# Altium PCB Sheet2.PcbDoc
Units mil, origin at the board's own origin, x right, y up, seen from the top; angles counter-clockwise.
Board outline 6000 x 4000 mil, 2 copper layers (Top Layer, Bottom Layer); 46 components, 38 nets, 171 pads, 0 vias.
Unrouted connection lines stored in the file: 97.
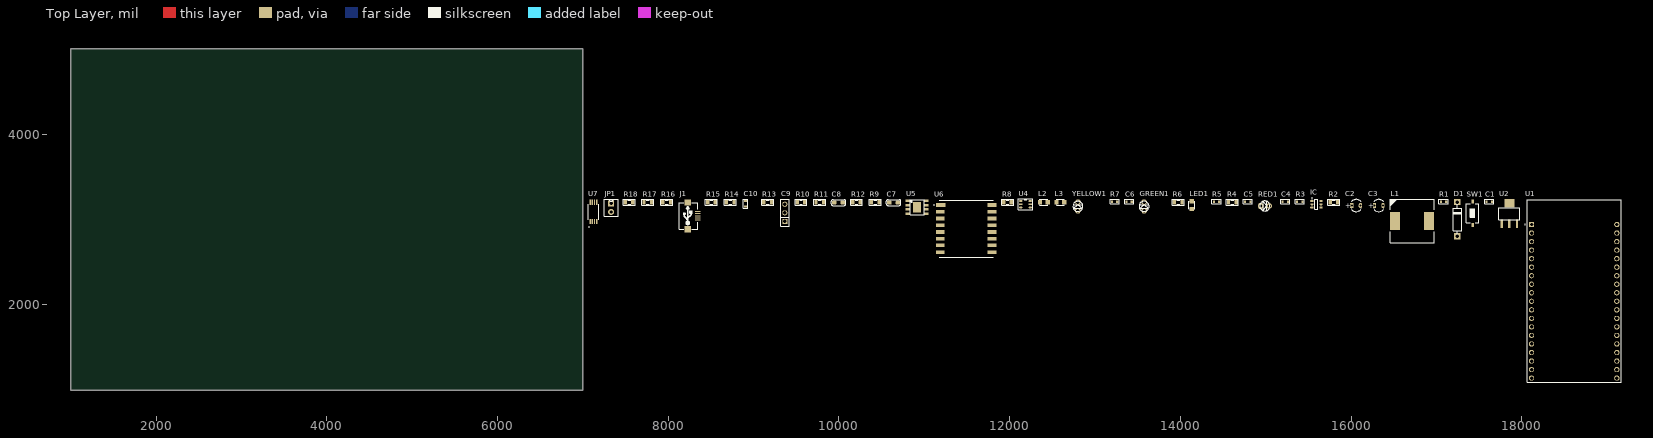
[diagram p0: Top Layer view]
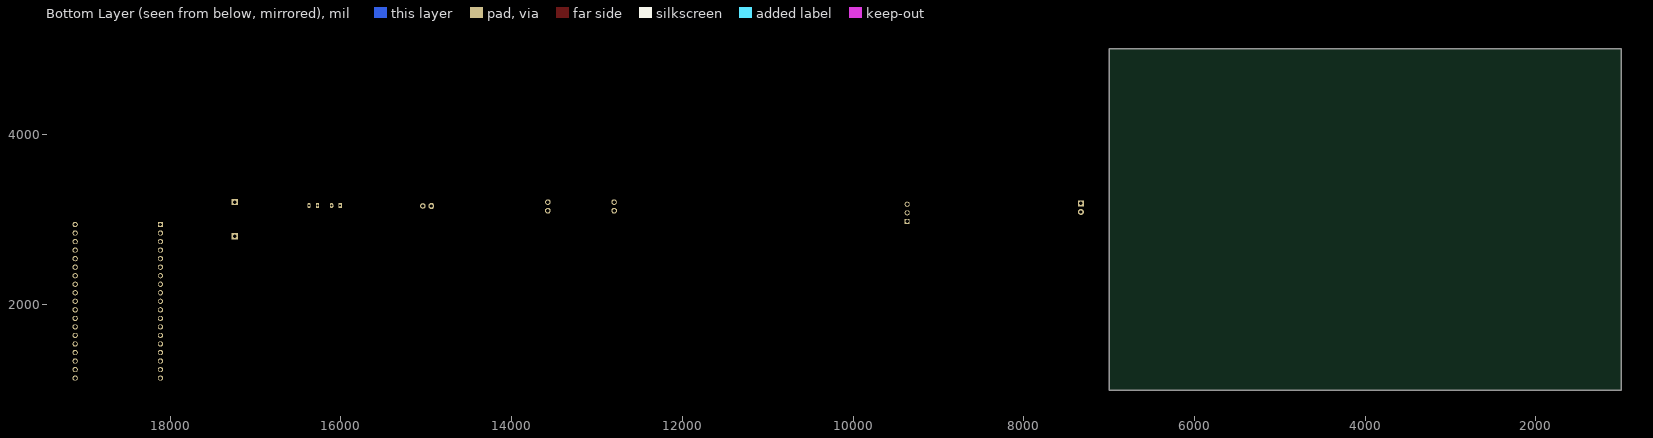
[diagram p1: Bottom Layer view, seen from below]

## Layer stack, top to bottom
Top Solder: solder mask 0.4, Solder Resist, Dk 3.5
Top Layer: signal copper 1.4
Dielectric 1: dielectric 12.6, FR-4, Dk 4.8
Bottom Layer: signal copper 1.4
Bottom Solder: solder mask 0.4, Solder Resist, Dk 3.5

## Board outline
1000,1000 7000,1000 7000,5000 1000,5000

## Design rules (kind name [scope] priority, off if disabled: settings)
Clearance [All] p1: gap=10 ignorepadtopadclearanceinfootprint=FALSE except(0: Arc-Hole Track-Hole SMDPad-Hole THPad-Hole Via-Hole Fill-Hole Poly-Hole Region-Hole Text-Hole)
PolygonConnect [All] p1: connectstyle=Relief reliefconductorwidth=10 reliefentries=4 polygonreliefangle="90 Angle" airgapwidth=10
RoutingVias [All] p1: holewidth=28 width=50 viastyle="Through Hole" minholewidth=28 minwidth=50 maxholewidth=28 maxwidth=50
SolderMaskExpansion [All] p1: expansion=4 istentingtop=FALSE
Width [All] p1: maxlimit=10 minlimit=10 preferedwidth=10
30 further rules are at their usual default settings.

## Components (designator, comment, footprint, x,y, rotation, side; value= is the part's Value field where it differs from the comment)
C1 "104" CAP0603 17620,3210 r0 top
C2 "10 uF" C3MM 16060,3165 r0 top
C3 "10 uF" C3MM 16325,3165 r0 top
C4 "22uF" CAP0603 15230,3210 r0 top
C5 "22uF" CAP0603 14790,3210 r0 top
C6 "104" CAP0603 13400,3210 r0 top
C7 "10uF" CAP_0805 10640,3200 r0 top value=33p
C8 "0.1 uF" CAP_0805 9995,3200 r0 top value=33p
C9 "JP3" JP3-C1T 9365,2980 r90 top
C10 "104" CAP0603 8905,3185 r90 top
D1 "SS54" DIODE/POW/1A 17245,2805 r90 top
GREEN1 "LED" LED-3MM-GREEN 13575,3105 r90 top value="LED 3 ly Single Colour"
IC "MT3608" "TSOP 2" 15595,3180 r0 top
J1 "USB-5" USB-M1 8345,3045 r90 top
JP1 "JP2" CON2 7330,3190 r0 top value="Connector 2"
L1 "22uH" IND_400_500_212x114_SMD 16715,2985 r0 top
L2 "LED 0805" LED-0805-Green 12355,3205 r0 top
L3 "LED 0805" LED-0805-Red 12550,3205 r0 top
LED1 "LED" LED-0805-Red 14135,3125 r90 top value="LED 3 ly Single Colour"
R1 "1.1K" RES0603 17085,3210 r0 top value=1K
R2 "110K" RES-SMD-0805 15800,3205 r0 top
R3 "1.1K" RES0603 15400,3210 r0 top value=1K
R4 "15k" RES-SMD-0805 14610,3205 r0 top
R5 "1.1K" RES0603 14425,3210 r0 top value=1K
R6 "330" RES-SMD-0805 13975,3205 r0 top
R7 "1.1K" RES0603 13230,3210 r0 top value=1K
R8 "1K" RES-SMD-0805 11975,3205 r0 top
R9 "100" RES-SMD-0805 10425,3205 r0 top
R10 "1k" RES-SMD-0805 9555,3205 r0 top
R11 "1k" RES-SMD-0805 9775,3205 r0 top
R12 "1K" RES-SMD-0805 10205,3205 r0 top
R13 "1k" RES-SMD-0805 9165,3205 r0 top
R14 "1K" RES-SMD-0805 8725,3205 r0 top
R15 "1.2k" RES-SMD-0805 8505,3205 r0 top
R16 "1K" RES-SMD-0805 7980,3205 r0 top
R17 "1K" RES-SMD-0805 7760,3205 r0 top
R18 "1K" RES-SMD-0805 7540,3205 r0 top
RED1 "LED" LED-3MM-RED 14940,3160 r0 top value="LED 3 ly Single Colour"
SW1 "SW" SW1-SMD 17425,3075 r90 top value="SW chip 2 pin"
U1 "ESP32-DEVKITC-32D" MODULE_ESP32-DEVKITC-32D 18615,2165 r0 top
U2 "LM1117-3V3" LM1117-SOP 17855,3000 r0 top
U4 "DW01A" SOT23-6 12190,3185 r0 top
U5 "TP4056" TP4056 10915,3145 r0 top
U6 "RA-01_LORA" MODULE_RA-02_LORA 11490,2895 r0 top
U7 "FS8205A" FS8205A 7125,3090 r90 top
YELLOW1 "LED" LED-3MM-YELLOW 12800,3105 r90 top value="LED 3 ly Single Colour"

## Footprints (in the part's own frame and the unit in brackets; to place one, negate y for a bottom-side part, rotate by r counter-clockwise, add the part's x,y. Pads: shape width x height; smd on the part's side, far side on the other; paste and mask are expansions set on the pad)
C3MM [mm]
  rect 1x1.5 hole 0.6: 1(-1.27,0)
  oval 1x1.5 hole 0.6: 2(1.27,0)
  silkscreen extent -1.5,-1.81 1.5,1.8, body extent -2,-2.03 1.99,1.97, height 7.01
CAP0603 [mm]
  rect 0.65x0.85 smd: 1(-0.8,0) 2(0.8,0)
  silkscreen extent -1.38,-0.67 1.38,0.67, body extent -0.8,-0.4 0.8,0.4, height 0.79
CAP_0805 [mil]
  rrect50% 50x50 smd: 1(-50,0) 2(50,0)
  silkscreen extent -85,-35 85,35, body extent -40,-25 40,25, height 24
CON2 [mil]
  rect 70x70 hole 39.37 unplated: 1(0,0)
  round 70 hole 39.37 unplated: 2(0,-100)
  silkscreen extent -82,-150 82,50
DIODE/POW/1A [mm]
  rect 1.8x1.8 hole 1: 1(0,0) 2(10.16,0)
  silkscreen extent 0.64,-1.27 9.53,1.14, body extent -0.38,-1.28 10.54,1.28, height 2.55
FS8205A [mm]
  rrect25% 1.56x0.4 smd: 1(-2.88,1.031) 2(-2.88,0.381) 3(-2.88,-0.269) 4(-2.88,-0.919) 5(2.88,-0.919) 6(2.88,-0.269) 7(2.88,0.381) 8(2.88,1.031)
  silkscreen extent -4.54,-1.46 2.25,1.57, body extent -3.2,-1.4 3.2,1.53, height 1.2
IND_400_500_212x114_SMD [mm] "wurth inductor"
  rect 2.9x5.4 smd: 1(-5.08,0) 2(5.08,0)
  silkscreen extent -6.48,-6.48 6.6,6.48, body extent -6.12,-6.02 6.13,6.03, height 8.1
JP3-C1T [mm] "3 row, straight, gold plating"
  rect 1.52x1.52 hole 1.02: 1(0,0)
  round 1.52 hole 1.02: 2(2.54,0) 3(5.08,0)
  silkscreen extent -1.52,-1.27 6.6,1.27, body extent -1.52,-1.25 6.6,1.25, height 8.51
LED-3MM-GREEN [mil]
  oct 65x65 hole 40: 1(0,0)
  round 65 hole 40: 2(100,0)
  silkscreen extent -9,-59 109,59, body extent -15,-70 112,60, height 182
LED-3MM-RED [mil]
  oct 65x65 hole 40: 1(0,0)
  round 65 hole 40: 2(100,0)
  silkscreen extent -9,-59 109,59, body extent -27,-77 117,80, height 181
LED-3MM-YELLOW [mil]
  oct 65x65 hole 40: 1(0,0)
  round 65 hole 40: 2(100,0)
  silkscreen extent -9,-59 109,59, body extent -27,-77 117,80, height 181
LED-0805-Green [mil]
  rect 50x55 smd: 1(0,0) 2(90,0)
  silkscreen extent 0,-35 90,35, body extent 5,-25 85,25, height 43
LED-0805-Red [mil]
  rect 50x55 smd: 1(0,0) 2(90,0)
  silkscreen extent 0,-35 90,35, body extent 5,-25 85,25, height 43
LM1117-SOP [mm]
  rect 0.7x2.54 smd: 1(-2.3,-1.27) 2(0,-1.27) 3(2.3,-1.27)
  rect 3x2.54 smd: 2(0,4.826)
  silkscreen extent -3.17,0 3.17,3.56, body extent -3.25,-1.78 3.25,5.18, height 1.68
MODULE_ESP32-DEVKITC-32D [mm]
  rect 1.56x1.56 / inner round 1.56 / far side rect 1.56x1.56 hole 1.04: J2-1(-12.7,19.76)
  round 1.56 hole 1.04: J2-2(-12.7,17.22) J2-3(-12.7,14.68) J2-4(-12.7,12.14) J2-5(-12.7,9.6) J2-6(-12.7,7.06) J2-7(-12.7,4.52) J2-8(-12.7,1.98) J2-9(-12.7,-0.56) J2-10(-12.7,-3.1) J2-11(-12.7,-5.64) J2-12(-12.7,-8.18) J2-13(-12.7,-10.72) J2-14(-12.7,-13.26) J2-15(-12.7,-15.8) J2-16(-12.7,-18.34) J2-17(-12.7,-20.88) J2-18(-12.7,-23.42) J2-19(-12.7,-25.96) J3-1(12.7,19.76) J3-2(12.7,17.22) J3-3(12.7,14.68) J3-4(12.7,12.14) J3-5(12.7,9.6) J3-6(12.7,7.06) J3-7(12.7,4.52) J3-8(12.7,1.98) J3-9(12.7,-0.56) J3-10(12.7,-3.1) J3-11(12.7,-5.64) J3-12(12.7,-8.18) J3-13(12.7,-10.72) J3-14(12.7,-13.26) J3-15(12.7,-15.8) J3-16(12.7,-18.34) J3-17(12.7,-20.88) J3-18(12.7,-23.42) J3-19(12.7,-25.96)
  silkscreen extent -14.7,-27.25 13.95,27.15, body extent -13.97,-27.9 13.97,27.2, height 6.69
MODULE_RA-02_LORA [mm]
  rect 2.8x1.1 smd: 1(-7.6,7)
  rect 2.6x1.1 smd: 2(-7.7,5) 3(-7.7,3) 4(-7.7,1) 5(-7.7,-1) 6(-7.7,-3) 7(-7.7,-5) 8(-7.7,-7) 9(7.7,-7) 10(7.7,-5) 11(7.7,-3) 12(7.7,-1) 13(7.7,1) 14(7.7,3) 15(7.7,5) 16(7.7,7)
  silkscreen extent -9.68,-8.5 8,8.5
RES0603 [mm]
  rect 0.65x0.85 smd: 1(-0.8,0) 2(0.8,0)
  silkscreen extent -1.38,-0.67 1.38,0.67, body extent -0.78,-0.42 0.77,0.43, height 0.45
RES-SMD-0805 [mil]
  rect 39.37x55 smd: 1(-45,0) 2(45,0)
  silkscreen extent -70,-34 70,33, body extent -39,-25 39,25, height 31
SOT23-6 [mil]
  oct 40x20 smd: 1(-59.41,32.4)
  oval 40x20 smd: 2(-59.41,-4.6) 3(-59.41,-42.6) 4(50.59,-42.6) 5(50,-5) 6(50.59,32.4)
  silkscreen extent -89,-68 81,57, body extent -64,-64 54,54, height 51
SW1-SMD [mm]
  rect 1.2x0.8 smd: 1(-3.5,0) 2(3.5,0)
  silkscreen extent -2.82,-1.85 2.82,1.85, body extent -3.05,-1.85 3.05,1.85, height 2.5
TP4056 [mm]
  rect 1.3x0.7 smd: 1(-2.75,1.905) 2(-2.75,0.635) 3(-2.75,-0.635) 4(-2.75,-1.905) 5(2.75,-1.905) 6(2.75,-0.635) 7(2.75,0.635) 8(2.75,1.905)
  rect 2.3x3.2 smd: GND(-0.025,0)
  silkscreen extent -2.1,-2.2 2.1,2.2, body extent -3.13,-2.45 2.87,2.45, height 1.75
"TSOP 2" [mm] "TSOP, 6-Leads, Body 2.90x1.60mm, Pitch 0.95mm, IPC Medium Density"
  oval 1x0.6 smd: 1(-1.35,0.95) 2(-1.35,0) 3(-1.35,-0.95) 4(1.35,-0.95) 5(1.35,0) 6(1.35,0.95)
  silkscreen extent -1.47,-1.5 0.45,1.92, body extent -1.27,-1.5 1.53,1.5, height 1.45
USB-M1 [mil]
  rect 10x70 smd: 1(51.18,0) 2(25.59,0) 3(0,0) 4(-25.59,0) 5(-50,0)
  rect 74.8x74.8 smd: 5(-155.51,116.84) 5(155.51,116.84)
  silkscreen extent -155,-1 155,215, body extent -157,5 158,218, height 107

## Part data
C1 C4 C5 C6 C10: library part CC0603JRNPO9BN300, "CAP CER 30PF 50V NPO 0603", Manufacturer=Yageo, Operating Temperature="-55°C ~ 125°C", Package / Case="0603 (1608 Metric)", Ratings=-, Supplier Part Number 1=311-3357-1-ND, Temperature Coefficient="C0G, NP0", Tolerance=±5%, Voltage - Rated=50V, Applications="General Purpose", Category=Capacitors, ComponentLink1Description=http://www.yageo.com/documents/recent/UPY-GP_NP0_16V-to-50V_16.pdf, ComponentLink1URL=http://www.yageo.com/documents/recent/UPY-GP_NP0_16V-to-50V_16.pdf, Failure Rate=-, Features=-, Height - Seated (Max)=-, Lead Spacing=-, Lead Style=-, Manufacturer Part Number=CC0603JRNPO9BN300, Mounting Type="Surface Mount, MLCC", Notification="Current market demand for these product types have resulted in fluctuating and extending lead times. Lead times may differ.", Packaging="Cut Tape (CT)", Part Status=Active, Pricing 1="1=0.1, 10=0.041, 100=0.0182, 500=0.01302, 1000=0.01022 (USD)", RoHS="RoHS Compliant", Size / Dimension="0.063\" L x 0.032\" W (1.60mm x 0.80mm)", Stock 1=0, Supplier 1=Digi-Key, Thickness (Max)="0.035\" (0.90mm)"
C2 C3: library part "Cap Pol", "Polarized Capacitor (Axial)", LatestRevisionDate=17-Jul-2002, LatestRevisionNote="Re-released for DXP Platform.", PackageReference=POLAR0.8, Published=8-Jun-2000, Publisher="Altium Limited"
C7 C8: library part CapSMD, "Capacitor", LatestRevisionDate=17-Jul-2002, LatestRevisionNote="Re-released for DXP Platform.", PackageReference=RAD-0.3, Published=8-Jun-2000, Publisher="Altium Limited"
C9: "WR-PHD 2.54 mm Angled Socket Header", Manufacturer="W¨¹rth Elektronik eiSos GmbH", partNo=613003143121, ComponentLink1 Description=Manufacturer, ComponentLink1URL=http://www.we-online.com, ComponentLink2 Description=Datasheet, ComponentLink2URL=http://katalog.we-online.de/em/datasheet/6130xx143121.pdf, Created by="Karrer Zheng", Created Date="29 March 2013", NoPins=03
D1: library part "Diode Power", "Diode Power", PackageDocument=Aug-1999, ComponentLink1Description="Manufacturer Link", ComponentLink1URL=http://www.fairchildsemi.com/, ComponentLink2Description=Datasheet, ComponentLink2URL=http://www.fairchildsemi.com/ds/1N%2F1N5400.pdf, DatasheetDocument=1998, LatestRevisionDate=17-Jul-2002, LatestRevisionNote="Re-released for DXP Platform.", PackageReference=DO-201AD, Published=8-Jun-2000, Publisher="Altium Limited"
GREEN1 LED1 RED1 YELLOW1: "LED Single colour Green and Red"
J1: Manufacturer=FCI, Manufacturer Part Number=10118193-0001LF, Supplier Part Number 1=609-4616-1-ND, .Checked PCB=RF, .Checked SCH=MM, .Creator=MM, Category="Connectors, Interconnects", ComponentLink1Description=http://portal.fciconnect.com/Comergent//fci/drawing/10118193.pdf, ComponentLink1URL=http://portal.fciconnect.com/Comergent//fci/drawing/10118193.pdf, Connector Type="USB - micro B", Features="Shielded, Solder Retention", Gender=Receptacle, Ingress Protection=-, Mounting Type="Surface Mount, Right Angle, Horizontal", Number of Contacts=5, Packaging="Cut Tape (CT)", Pricing 1="1=0.46, 10=0.433, 25=0.3712, 50=0.3156, 100=0.3032, 250=0.27224, 500=0.25988 (USD)", RoHS="RoHS Compliant", Specifications="USB 2.0", Stock 1=28642, Supplier 1=Digi-Key
JP1: library part Con2, "Connector 2"
L1: library part IND_1mH-0.6A-20%-SMD, "1mH Shielded Wirewound Inductor 600mA 1.82Ohm Max Nonstandard", Alternate Part Number-1=NA, Case/Package=SMD, Manufacturer=Coilcraft, Manufacturer Part Number=74477030, Supplier Part Number-1=74477030, Supplier-1=WURTH
L2: library part "LED 0805 Xanh La", "Dán", Chung_Loai=Dán, Don_Vi=Con, Ma_Hang=MH002326, Ten_Linh_Kien="LED 0805 Màu Xanh Lá (Green)"
L3: library part "LED 0805 Do", "Dán", Chung_Loai=Dán, Don_Vi=Con, Ma_Hang=MH000897, Ten_Linh_Kien="LED 0805 Màu Đỏ (Red)"
R1 R3 R5 R7: library part RT0603FRD071KL, "RES SMD 1K OHM 1% 1/10W 0603", Manufacturer=Yageo, Operating Temperature="-55°C ~ 155°C", Package / Case="0603 (1608 Metric)", Power (Watts)="0.1W, 1/10W", Supplier Device Package=0603, Supplier Part Number 1=YAG5719CT-ND, Temperature Coefficient=±25ppm/°C, Tolerance=±1%, Category=Resistors, ComponentLink1Description=http://www.yageo.com/documents/recent/PYu-RT_1-to-0.01_RoHS_L_9.pdf, ComponentLink1URL=http://www.yageo.com/documents/recent/PYu-RT_1-to-0.01_RoHS_L_9.pdf, Composition="Thin Film", Failure Rate=-, Features="Moisture Resistant", Height - Seated (Max)="0.022\" (0.55mm)", Manufacturer Part Number=RT0603FRD071KL, Packaging="Cut Tape (CT)", Part Status=Active, Pricing 1="1=0.17, 10=0.143, 100=0.0561, 1000=0.02346, 2500=0.02151 (USD)", RoHS="RoHS Compliant", Size / Dimension="0.063\" L x 0.032\" W (1.60mm x 0.80mm)", Stock 1=0, Supplier 1=Digi-Key
R2 R4 R6 R8 R9 R10 R11 R12 R13 R14 R15 R16 R17 R18: library part "Resistor - SMD", "Resistor", Manufacturer="Generic Components", Class=Passive, Published=08/06/2000, Publisher="Altium Hobart Technology Centre"
SW1: library part SW2, "Switch button 2 pin"
U1: "WiFi Development Tools (802.11) ESP32 General Development Kit, ESP32-WROOM-32D on the board", Package=None, Check_prices=https://www.snapeda.com/parts/ESP32-DEVKITC-32D/Espressif+Systems/view-part/?ref=eda, MF="Espressif Systems", MP=ESP32-DEVKITC-32D, SnapEDA_Link=https://www.snapeda.com/parts/ESP32-DEVKITC-32D/Espressif+Systems/view-part/?ref=snap
U2: library part LM1117-ADJ, "800mA Low-Dropout Linear Regulator", Creator="Nguyen Ba Bien", Website=http://group3i.net
U4: "One Cell Lithium-ion/Polymer Battery Protection IC"
U5: "Complete single cell Li-Ion battery with a constant current / constant voltage linear charger"
U6: library part RA-02_LORA, "Ra-02 LoRa RF M5Stack Platform Evaluation Expansion Board", Package=None, Availability=Unavailable, MP=RA-02_LORA, Price=None

## Nets (pads, with @x,y where several pads share a name; then routed paths per layer and width w, separated by ;. In a path a pad name is that pad's centre, name@x,y a point inside that pad or via, vN(x,y) a via of type N, cw(c..) or ccw(c..) an arc to the next point about the centre after c; other vN are vias at no path point)
3V3: C1.1 C3.1 R1.1 U1.J2-1 U2.2 U6.3
5V: C2.1 C6.1 C9.3 C10.1 R6.1 U1.J2-19 U2.3
5v: C4.1 D1.2 R2.2
Data: C9.2 U1.J3-16
DIO0: R12.2 U6.5
GND: C1.2 C2.2 C3.2 C4.2 C5.2 C6.2 C7.1 C8.1 C9.1 C10.2 GREEN1.2 J1.5 JP1.2 LED1.2 R4.1 R13.1 R15.1 RED1.2 SW1.2 U1.J2-14 U1.J3-1 U1.J3-7 U2.1 U4.6 U5.1 U5.3 U6.1 U6.2 U6.9 U6.16 U7.2 U7.3 U7.6 U7.7 YELLOW1.2
GREEN: R5.1 U1.J2-10
IO2: R12.1 U1.J3-15
IO5: R14.1 U1.J3-10
IO13: R1.2 SW1.1 U1.J2-15
IO14: R8.1 U1.J2-12
IO18: R18.1 U1.J3-9
IO19: R16.1 U1.J3-8
IO23: R17.1 U1.J3-2
MISO: R16.2 U6.13
MOSI: R17.2 U6.14
NetC8_2: C8.2 R9.1 U4.5
NetD1_1: D1.1 IC.1 L1.2
NetGREEN1_1: GREEN1.1 R5.2
NetIC_3: IC.3 R2.1 R4.2
NetL2_2: L2.2 R10.2
NetL3_2: L3.2 R11.2
NetLED1_1: LED1.1 R6.2
NetR3_2: R3.2 RED1.1
NetR7_2: R7.2 YELLOW1.1
NetR10_1: R10.1 U5.6
NetR11_1: R11.1 U5.7
NetR13_2: R13.2 U4.2
NetR15_2: R15.2 U5.2
NetU4_1: U4.1 U7.4
NetU4_3: U4.3 U7.5
NSS: R14.2 U6.15
RED: R3.1 U1.J2-9
RST: R8.2 U6.4
SCK: R18.2 U6.12
VBat+: C5.1 IC.4 IC.5 JP1.1 L1.1 R9.2 U5.5
VCC: C7.2 J1.1 L2.1 L3.1 U5.4 U5.8
YELLOW: R7.1 U1.J2-11
pads on no net: IC.2 IC.6 J1.2 J1.3 J1.4 U1.J2-2 U1.J2-3 U1.J2-4 U1.J2-5 U1.J2-6 U1.J2-7 U1.J2-8 U1.J2-13 U1.J2-16 U1.J2-17 U1.J2-18 U1.J3-3 U1.J3-4 U1.J3-5 U1.J3-6 U1.J3-11 U1.J3-12 U1.J3-13 U1.J3-14 U1.J3-17 U1.J3-18 U1.J3-19 U4.4 U5.GND U6.6 U6.7 U6.8 U6.10 U6.11 U7.1 U7.8

## Text inside footprints (layer, text, board x,y; h text height)
C2: Top Overlay "+" at 15935,3135 h60
C3: Top Overlay "+" at 16200,3135 h60